# Altium PCB BMS_Carrier_Board.PcbDoc (part 1 of 3)
Units mm, origin at the board's own origin, x right, y up, seen from the top; angles counter-clockwise.
Board outline 80 x 70 mm, 2 copper layers (Top Layer, Bottom Layer); 98 components, 80 nets, 377 pads, 123 vias.
Unrouted connection lines stored in the file: 52.
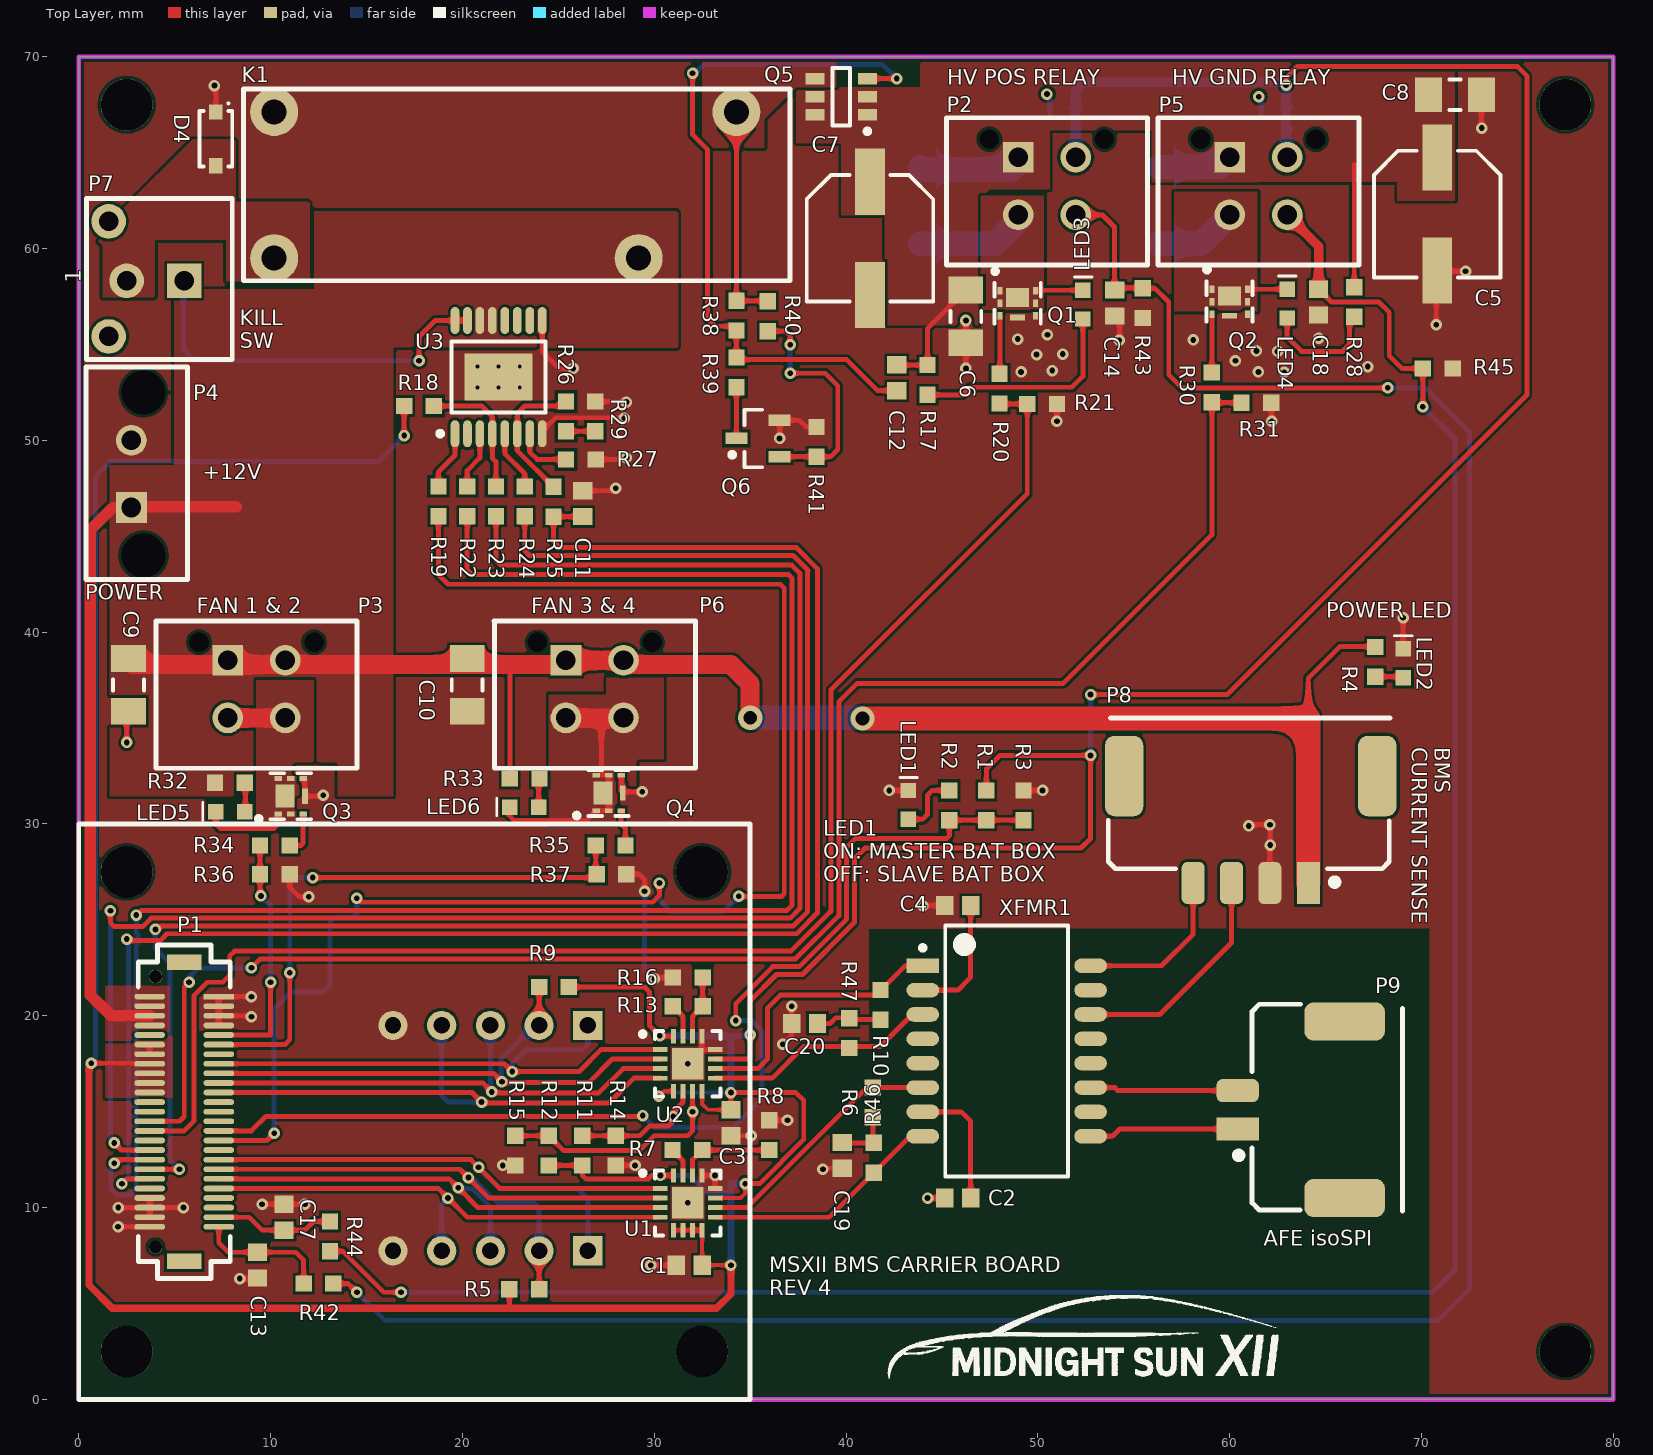
[diagram p0: Top Layer view]
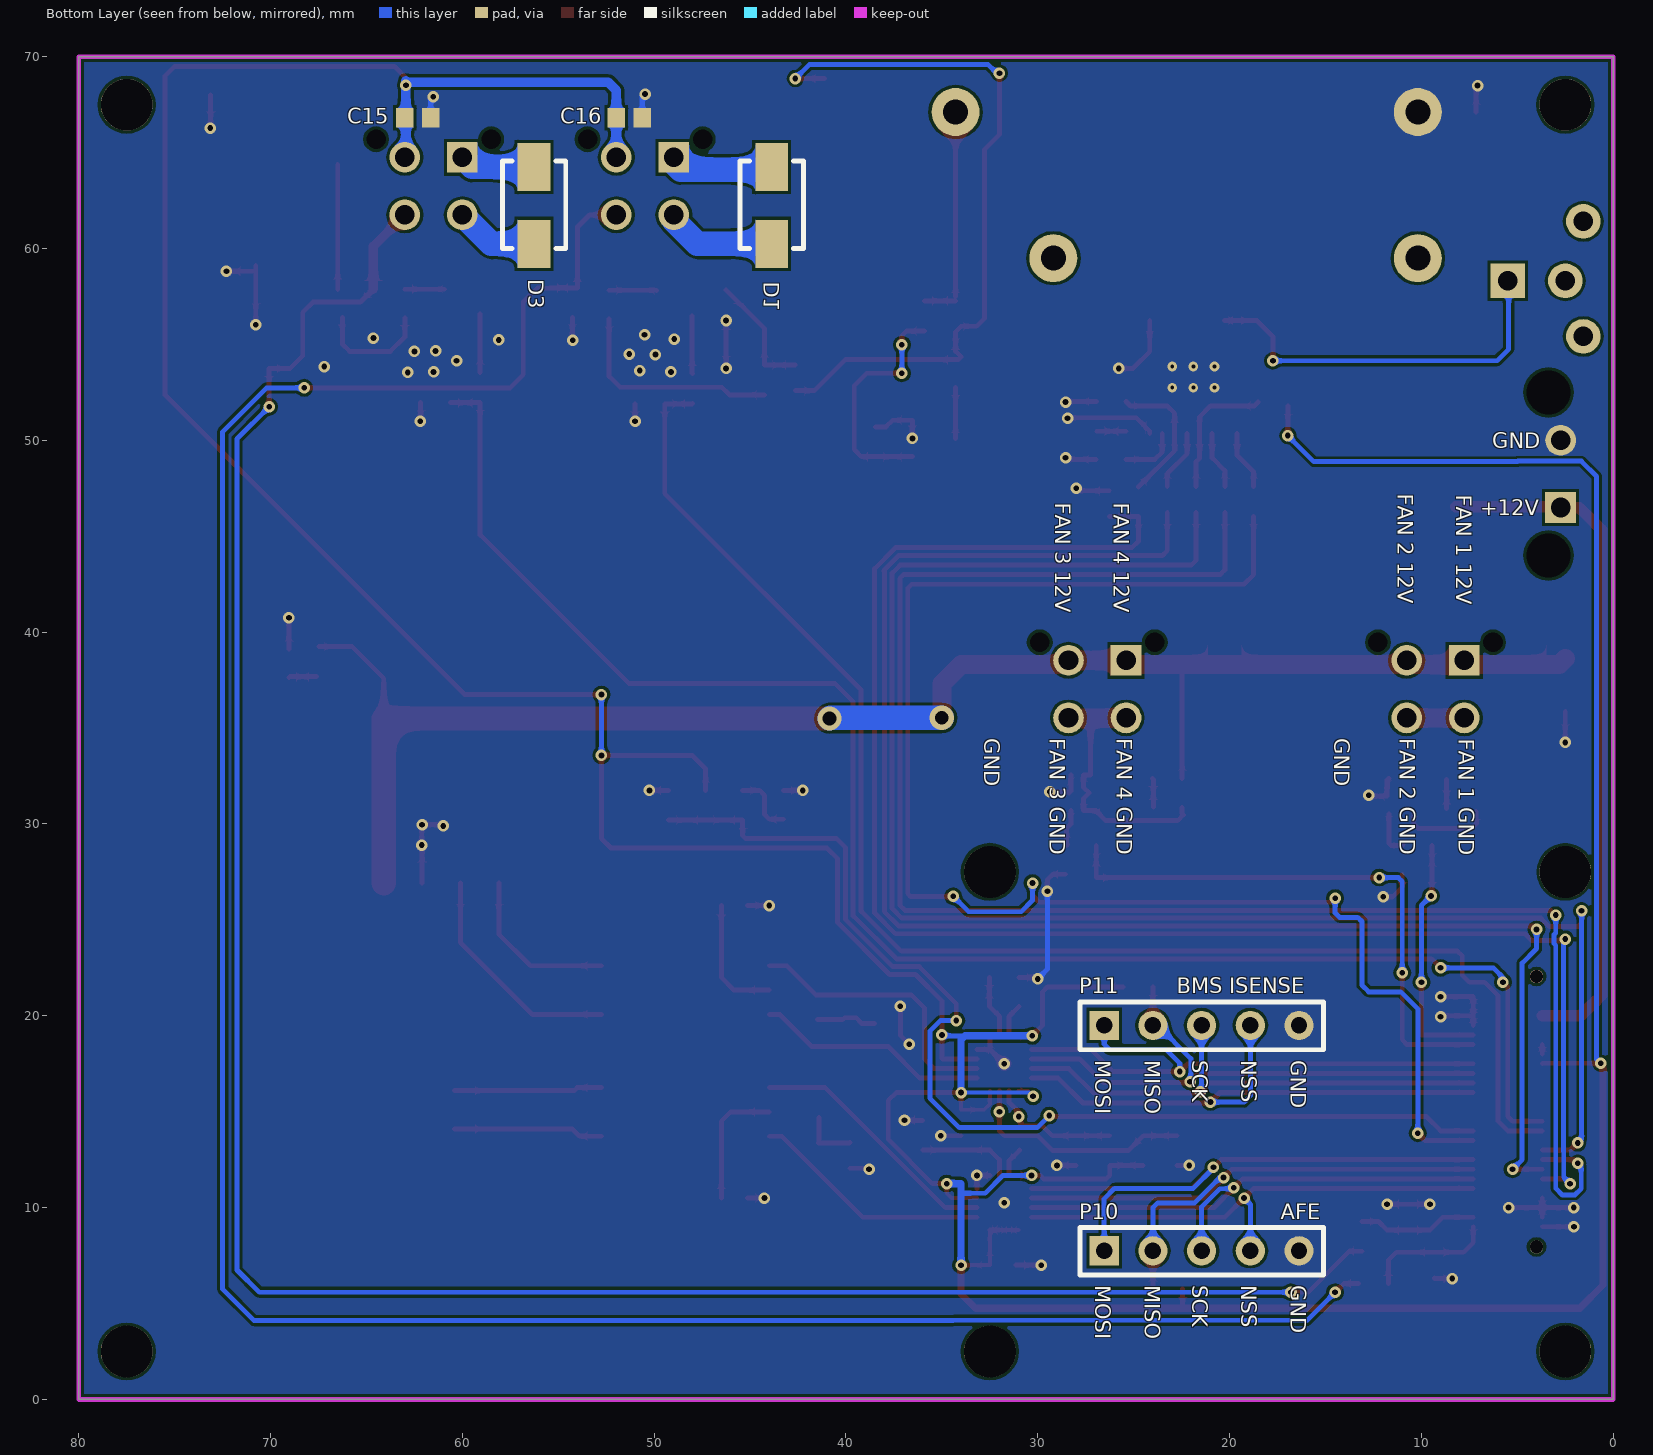
[diagram p1: Bottom Layer view, seen from below]
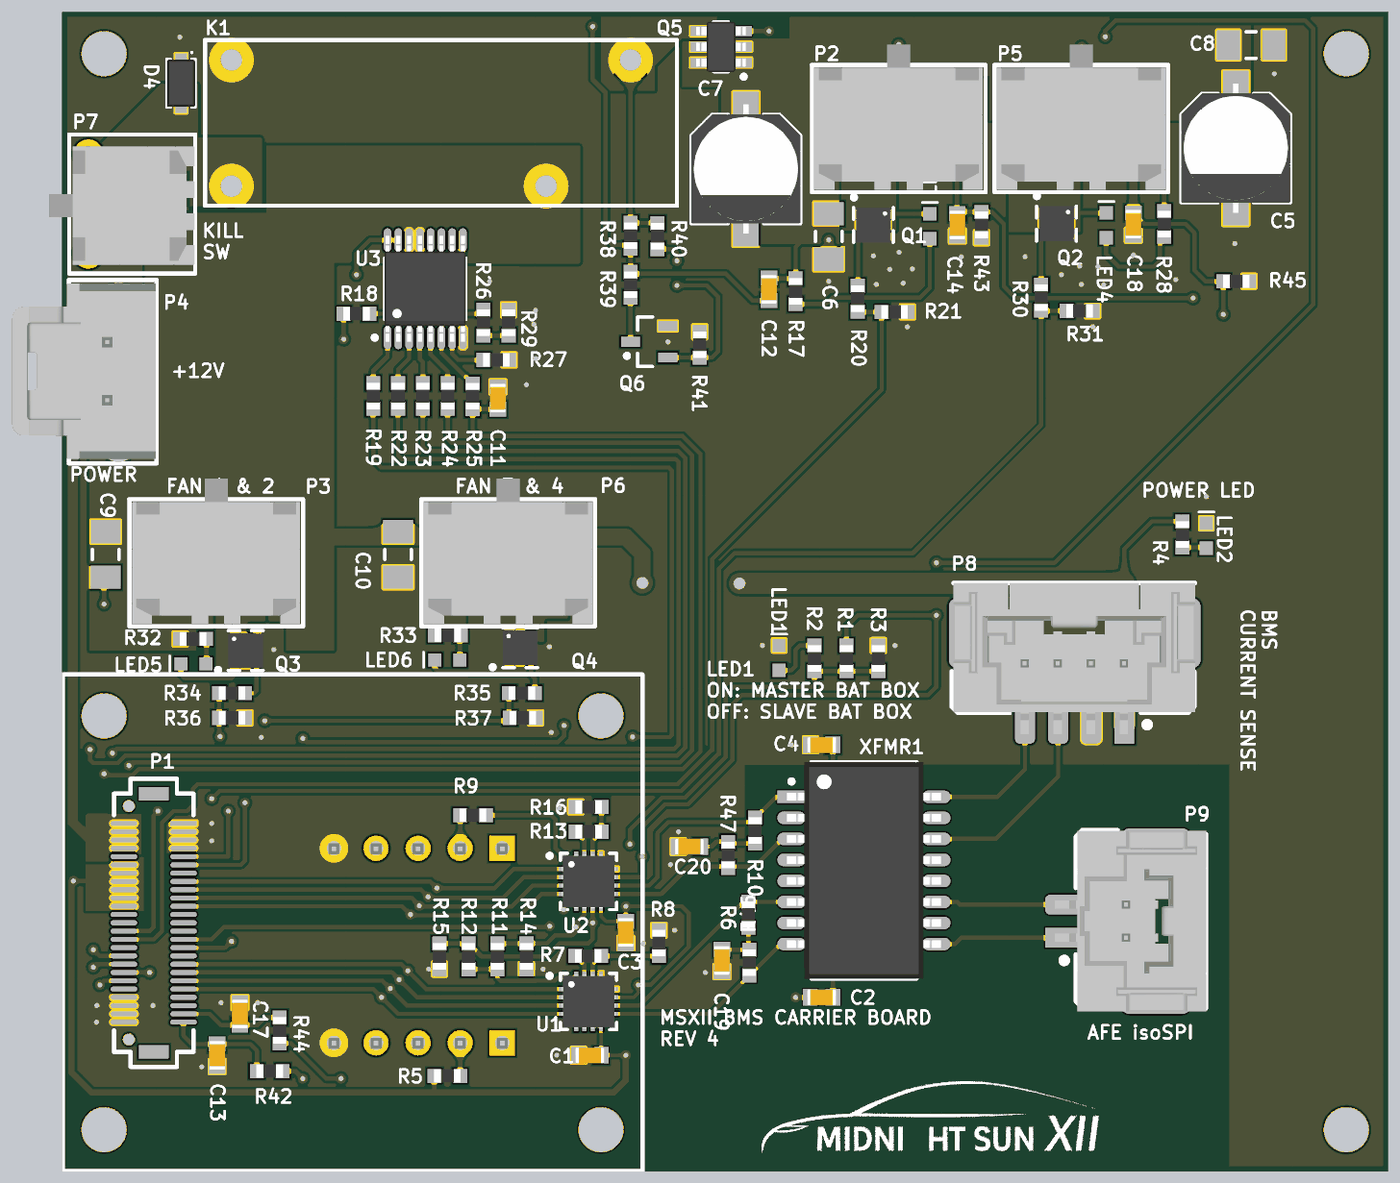
[diagram p3: 3D render of the assembled board from above, using the file's embedded part models]
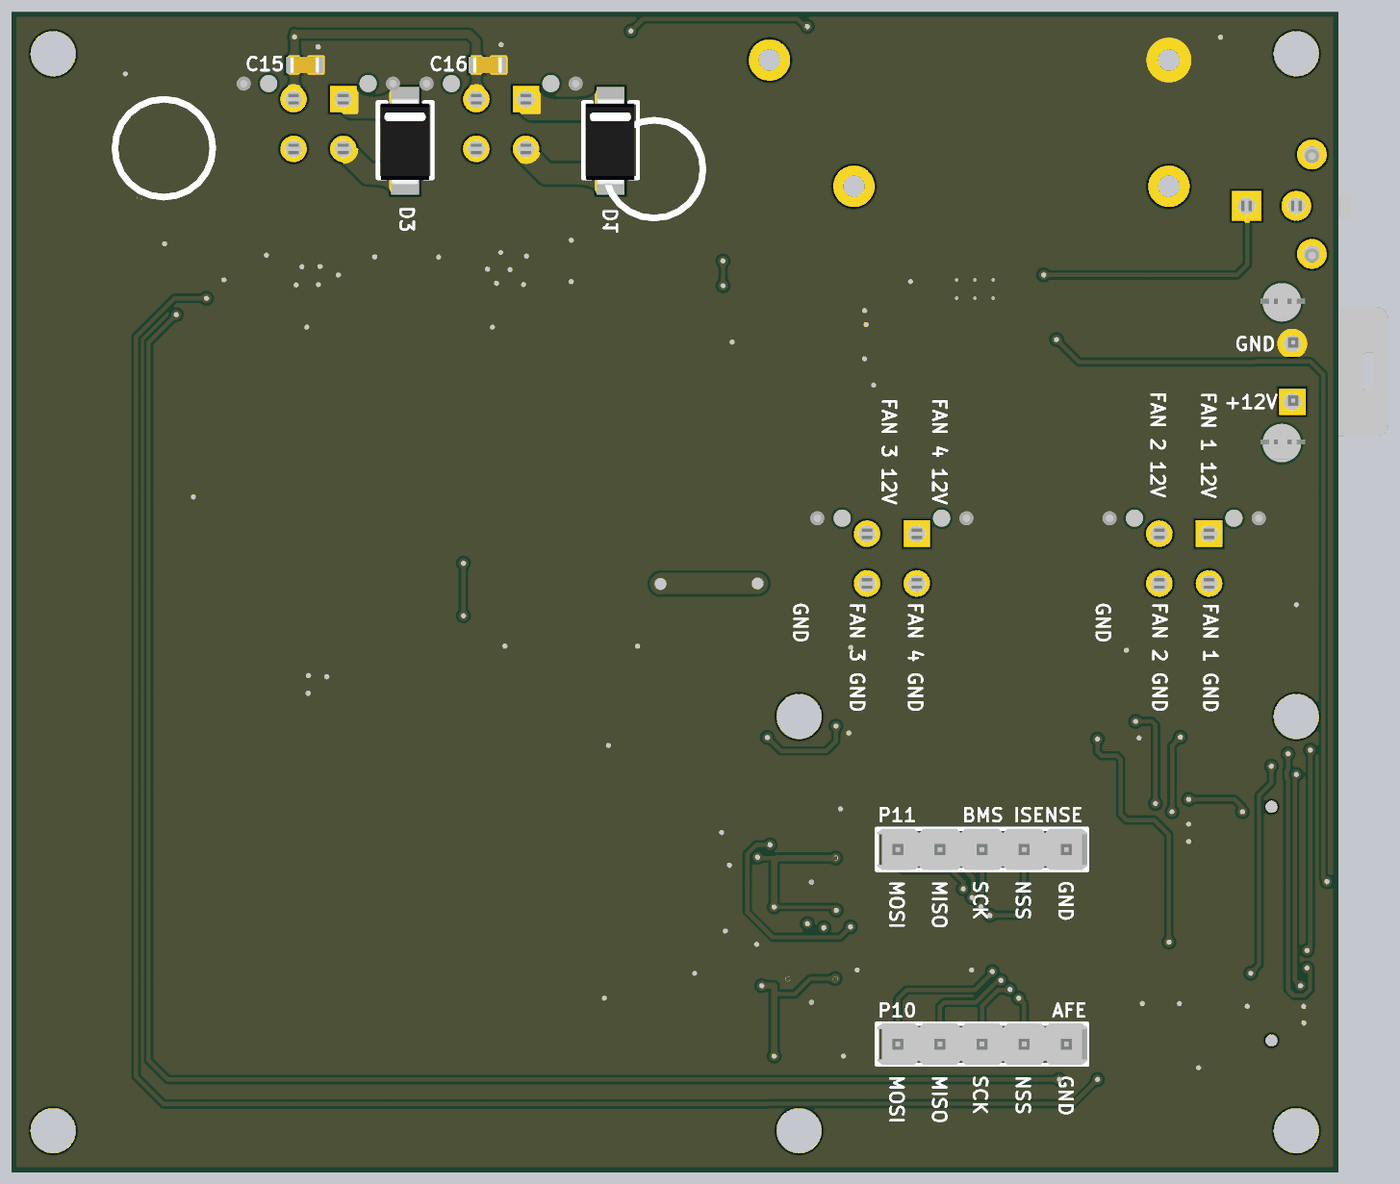
[diagram p4: 3D render of the assembled board from below, using the file's embedded part models]

## Layer stack, top to bottom
Top Solder: solder mask 0.0102, Solder Resist, Dk 3.5
Top Layer: signal copper 0.0356
Dielectric 1: dielectric 0.32, FR-4, Dk 4.8
Bottom Layer: signal copper 0.0356
Bottom Solder: solder mask 0.0102, Solder Resist, Dk 3.5

## Board outline
0,0 80,0 80,70 0,70 0,0

## Design rules (kind name [scope] priority, off if disabled: settings)
Clearance [All] p1: gap=0.152 ignorepadtopadclearanceinfootprint=TRUE except(0: Arc-Hole Track-Hole SMDPad-Hole THPad-Hole Via-Hole Fill-Hole Poly-Hole Region-Hole Text-Hole)
DiffPairsRouting [All] p1: maxlimit=0.254 minlimit=0.254 mostfreqgap=0.254 toplayer_minwidth=0.229 toplayer_maxwidth=0.381 toplayer_prefwidth=0.254 bottomlayer_minwidth=0.229 bottomlayer_maxwidth=0.381 bottomlayer_prefwidth=0.254 maxuncoupledlength=12.7
HoleSize [All] p1: absolutevalues=TRUE maxlimit=5.08 minlimit=0.025 maxpercent=80.000 minpercent=20.000
PasteMaskExpansion [All] p1 off: expansion=0
PlaneConnect [All] p1: planeconnectstyle=Direct reliefexpansion=0.508 reliefentries=4 reliefconductorwidth=0.254 reliefairgap=0.254
PolygonConnect [All] p1: connectstyle=Direct reliefconductorwidth=0.254 reliefentries=4 polygonreliefangle="90 Angle" airgapwidth=0.254
RoutingVias [All] p1: holewidth=0.3 width=0.6 viastyle="Through Hole" minholewidth=0.3 minwidth=0.3 maxholewidth=1.27 maxwidth=1.27 viatemplateguid#1={C0391581-418B-4562-8F26-D689074507C8} viatemplatename#1=v60h30m0mx0
SilkToBoardRegionClearance [All] p1 off:
SilkToSilkClearance [All] p1 off: silktosilkclearance=0.254
SilkToSolderMaskClearance [IsPad] p1 off: minsilkscreentomaskgap=0.254 clearancetoexposedcopper=TRUE
SolderMaskExpansion [All] p1: expansion=0.102
Width [All] p1: maxlimit=2.54 minlimit=0.203 preferedwidth=0.203
23 further rules are at their usual default settings.

## Classes and differential pairs
component class "BMS Carrier - Firmware Contactor Control": C13 C14 C15 C16 C17 C18 R42 R43 R44 R45
component class "BMS Carrier - Fan Controls": C9 C10 LED5 LED6 Q3 Q4 R32 R33 R34 R35 R36 R37
component class "BMS Carrier - Battery Relay Controls": C5 C6 C7 C8 C11 C12 D1 D3 D4 K1 LED3 LED4 Q1 Q2 Q5 Q6 R17 R18 R19 R20 R21 R22 R23 R24 R25 R26 R27 R28 R29 R30 R31 R38 R39 R40 R41 U3
component class "BMS Carrier - Current Sense Interface": C3 C4 C20 P11 R9 R10 R11 R12 R13 R14 R15 R16 R47 U2 XFMR1
component class "BMS Carrier - AFE Interface": C1 C2 C19 P10 R5 R6 R7 R8 R46 TP3/MOSI U1
component class "BMS Carrier - Connectors": LED2 P2 P3 P4 P5 P6 P7 P8 P9 R4
component class Controller_Board_Interface: LED1 P1 R1 R2 R3
differential pair I: +I_P -I_N
differential pair ISOSPI: +ISOSPI_P -ISOSPI_N
differential pair CURR: +CURR_P -CURR_N
differential pair CURR_ISOSPI: +CURR_ISOSPI_P -CURR_ISOSPI_N

## Components (designator, comment, footprint, x,y, rotation, side; value= is the part's Value field where it differs from the comment)
C1 "CAP CER 0.1UF 50V 10% X7R 0603" "CAP, 0603" 31.825,7 r180 top
C2 "CAP CER 20PF 50V ±5% C0G/NP0 0603" "CAP, 0603" 45.825,10.5 r180 top
C3 "CAP CER 0.1UF 50V 10% X7R 0603" "CAP, 0603" 34,14.425 r270 top
C4 "CAP CER 20PF 50V ±5% C0G/NP0 0603" "CAP, 0603" 45.825,25.75 r180 top
C5 "47UF" "CAP ALUM 6.3MM RADIAL SMD" 70.824,61.8 r270 top
C6 "CAP CER 2.2UF 100V ±20% X7R 1206" "CAP, 1206" 46.25,56.461 r270 top
C7 "47UF" "CAP ALUM 6.3MM RADIAL SMD" 41.25,60.535 r270 top
C8 "CAP CER 2.2UF 100V ±20% X7R 1206" "CAP, 1206" 71.75,68.02 r0 top
C9 "CAP CER 2.2UF 100V ±20% X7R 1206" "CAP, 1206" 2.594,37.25 r270 top
C10 "CAP CER 2.2UF 100V ±20% X7R 1206" "CAP, 1206" 20.25,37.25 r270 top
C11 "CAP CER 0.1UF 50V 10% X7R 0603" "CAP, 0603" 26.275,46.702 r90 top
C12 "CAP CER 4.7UF 25V 10% X5R 0603" "CAP, 0603" 42.644,53.269 r270 top
C13 "CAP CER 0.1UF 50V 10% X7R 0603" "CAP, 0603" 9.324,7 r270 top
C14 "CAP CER 10nF 50V 5% X7R 0603" "CAP, 0603" 54.014,57.159 r270 top
C15 "CAP CER 10nF 50V 5% X7R 0603" "CAP, 0603" 62.325,66.82 r180 bottom
C16 "CAP CER 10nF 50V 5% X7R 0603" "CAP, 0603" 51.3,66.82 r180 bottom
C17 "CAP CER 0.1UF 50V 10% X7R 0603" "CAP, 0603" 10.7,9.5 r90 top
C18 "CAP CER 10nF 50V 5% X7R 0603" "CAP, 0603" 64.64,57.209 r270 top
C19 "CAP CER 10nF 50V 5% X7R 0603" "CAP, 0603" 39.8,12.725 r270 top
C20 "CAP CER 10nF 50V 5% X7R 0603" "CAP, 0603" 37.842,19.6 r180 top
D1 "DIODE SCHOTTKY 60V 3A SMA" "Diode, SMA" 43.874,60.25 r90 bottom
D3 "DIODE SCHOTTKY 60V 3A SMA" "Diode, SMA" 56.265,60.25 r90 bottom
D4 "DIODE GEN PURP 100V 300MA SOD123" "DIODE GEN PURP 100V 300MA SOD123" 7.149,65.72 r270 top
K1 "G6RN-1A DC12" "RELAY SPST 8A 12VDC" 8.588,58.31 r0 top
LED1 "LED RED CLEAR 2V 0603" LED_0603 43.26,30.3 r90 top
LED2 "LED GREEN CLEAR 2V 0603" LED_0603 69.055,37.683 r90 top
LED3 "LED YELLOW CLEAR 2.1V 0603" LED_0603 52.359,56.375 r90 top
LED4 "LED YELLOW CLEAR 2.1V 0603" LED_0603 63.01,56.434 r90 top
LED5 "LED YELLOW CLEAR 2.1V 0603" LED_0603 8.599,30.655 r180 top
LED6 "LED YELLOW CLEAR 2.1V 0603" LED_0603 23.925,30.885 r180 top
P1 "CONN 50POS Bergstak Plug 0.02\"" "CONN, Bergstak 50 Pos Plug" 5.5,15 r0 top
P2 "CONN 4POS MICROFIT (2x2)" "CONN 4POS MICROFIT (2X2)" 51.975,61.76 r0 top
P3 "CONN 4POS MICROFIT (2x2)" "CONN 4POS MICROFIT (2x2)" 10.768,35.53 r0 top
P4 "CONN 2POS ULTRA-FIT 0.138\"" "CONN, 2POS ULTRA-FIT" 2.745,46.5 r90 top
P5 "CONN 4POS MICROFIT (2x2)" "CONN 4POS MICROFIT (2X2)" 63,61.76 r0 top
P6 "CONN 4POS MICROFIT (2x2)" "CONN 4POS MICROFIT (2x2)" 28.4,35.53 r0 top
P7 "CONN 2POS MICRO-FIT 3mm" "CONN, 2POS MICRO-FIT" 5.5,58.42 r90 top
P8 "Dura-Clik" "CONN, 4POS DURA-CLIK VERT" 64.1,26.92 r180 top
P9 "Dura-Clik" "CONN, 2POS Dura-Click Vertical" 60.42,14.1 r90 top
P10 "5POS 0.1\"" "CONN, 5POS HEADR 0.1\"" 26.54,7.75 r180 bottom
P11 "5POS 0.1\"" "CONN, 5POS HEADR 0.1\"" 26.54,19.5 r180 bottom
Q1 "MOSFET N-CH 30V 8.7A 2.1W 6-PQFN (2x2)" "MOSFET N-CH 30V 12A 2mmx2mm PQFN" 48.025,57.8 r270 top
Q2 "MOSFET N-CH 30V 8.7A 2.1W 6-PQFN (2x2)" "MOSFET N-CH 30V 12A 2mmx2mm PQFN" 59.075,57.884 r270 top
Q3 "MOSFET N-CH 30V 8.7A 2.1W 6-PQFN (2x2)" "MOSFET N-CH 30V 12A 2mmx2mm PQFN" 10.4,30.525 r0 top
Q4 "MOSFET N-CH 30V 8.7A 2.1W 6-PQFN (2x2)" "MOSFET N-CH 30V 12A 2mmx2mm PQFN" 26.975,30.695 r0 top
Q5 "MOSFET P-CH 30V 4A 1.6W SOT-23-6" P-MOSFET 39.75,67.916 r180 top
Q6 "MOSFET N-CH 60V 310MA SOT23" SOT23 35.413,50.1 r180 top
R1 "RES 0.0 OHM 1/4W 0603" "RES, 0603" 47.319,30.975 r270 top
R2 "RES 604 OHM 1% 1/10W 0603" "RES, 0603" 45.388,30.975 r90 top
R3 "RES 0.0 OHM 1/4W 0603" "RES, 0603" 49.25,30.975 r90 top
R4 "RES 4.7K OHM 1% 1/10W 0603" "RES, 0603" 67.6,38.458 r270 top
R5 "2K" "RES, 0603" 23.225,5.75 r0 top
R6 "62R" "RES, 0603" 41.4,15.485 r270 top
R7 "RES 1.4k OHM 1% 1/10W 0603" "RES, 0603" 31.725,13 r0 top
R8 "RES 604 OHM 1% 1/10W 0603" "RES, 0603" 36,13.775 r90 top
R9 "2K" "RES, 0603" 24.775,21.5 r180 top
R10 "62R" "RES, 0603" 41.8,20.575 r270 top
R11 "RES 0.0 OHM 1/4W 0603" "RES, 0603" 26.25,12.975 r90 top
R12 "RES 0.0 OHM 1/4W 0603" "RES, 0603" 24.5,12.975 r90 top
R13 "RES 1.4k OHM 1% 1/10W 0603" "RES, 0603" 31.75,20.5 r0 top
R14 "RES 0.0 OHM 1/4W 0603" "RES, 0603" 28,12.975 r270 top
R15 "RES 0.0 OHM 1/4W 0603" "RES, 0603" 22.75,12.975 r270 top
R16 "RES 604 OHM 1% 1/10W 0603" "RES, 0603" 31.75,22 r180 top
R17 "RES 4.7K OHM 1% 1/10W 0603" "RES, 0603" 44.25,53.15 r270 top
R18 "RES 10K OHM 1% 1/10W 0603" "RES, 0603" 17.74,51.791 r180 top
R19 "RES 4.7K OHM 1% 1/10W 0603" "RES, 0603" 18.75,46.825 r90 top
R20 "RES 22.1 OHM 1% 1/10W 0603" "RES, 0603" 48,52.7 r90 top
R21 "RES 10K OHM 1% 1/10W 0603" "RES, 0603" 50.225,51.9 r0 top
R22 "RES 4.7K OHM 1% 1/10W 0603" "RES, 0603" 20.25,46.825 r90 top
R23 "RES 4.7K OHM 1% 1/10W 0603" "RES, 0603" 21.75,46.825 r90 top
R24 "RES 4.7K OHM 1% 1/10W 0603" "RES, 0603" 23.25,46.825 r90 top
R25 "RES 4.7K OHM 1% 1/10W 0603" "RES, 0603" 24.75,46.8 r90 top
R26 "RES 3.3K OHM 1% 1/4W 0603" "RES, 0603" 25.4,51.25 r270 top
R27 "RES 4.7K OHM 1% 1/10W 0603" "RES, 0603" 26.175,49.007 r0 top
R28 "RES 4.7K OHM 1% 1/10W 0603" "RES, 0603" 66.5,57.214 r270 top
R29 "2K" "RES, 0603" 26.925,51.25 r90 top
R30 "RES 22.1 OHM 1% 1/10W 0603" "RES, 0603" 59.075,52.766 r90 top
R31 "RES 10K OHM 1% 1/10W 0603" "RES, 0603" 61.399,51.966 r0 top
R32 "RES 4.7K OHM 1% 1/10W 0603" "RES, 0603" 7.874,32.145 r0 top
R33 "RES 4.7K OHM 1% 1/10W 0603" "RES, 0603" 23.25,32.375 r0 top
R34 "RES 22.1 OHM 1% 1/10W 0603" "RES, 0603" 10.225,28.88 r180 top
R35 "RES 22.1 OHM 1% 1/10W 0603" "RES, 0603" 27.725,28.88 r180 top
R36 "RES 10K OHM 1% 1/10W 0603" "RES, 0603" 10.225,27.38 r0 top
R37 "RES 10K OHM 1% 1/10W 0603" "RES, 0603" 27.775,27.38 r0 top
R38 "RES 330 OHM 1% 1/10W 0603" "RES, 0603" 34.288,56.5 r270 top
R39 "1K" "RES, 0603" 34.288,53.544 r270 top
R40 "RES 0.0 OHM 1/4W 0603" "RES, 0603" 35.913,56.472 r270 top
R41 "RES 10K OHM 1% 1/10W 0603" "RES, 0603" 38.459,49.925 r90 top
R42 "1K" "RES, 0603" 12.5,6.04 r0 top
R43 "RES 10K OHM 1% 1/10W 0603" "RES, 0603" 55.47,57.159 r270 top
R44 "1K" "RES, 0603" 13.1,8.5 r270 top
R45 "RES 10K OHM 1% 1/10W 0603" "RES, 0603" 70.85,53.75 r0 top
R46 "62R" "RES, 0603" 41.45,12.6 r90 top
R47 "62R" "RES, 0603" 40.17,19.1 r90 top
U1 "IC ISOSPI COMM INTERFACE LTC6820IUD" "IC COMM INTERFACE ISOSPI 16-QFN" 30.325,11 r0 top
U2 "IC ISOSPI COMM INTERFACE LTC6820IUD" "IC COMM INTERFACE ISOSPI 16-QFN" 30.325,18.25 r0 top
U3 "296-45179-1-ND" "IC HSD Dual-Channel TSOP65P640X120_HS-17N" 21.89,53.3 r90 top
XFMR1 "IC PULSE XFMR 1CT:1CT 350UH SMD" "IC, PULSE XFMR 1CT:1CT 350UH SMD" 48.375,18.165 r0 top

## Footprints (in the part's own frame and the unit in brackets; to place one, negate y for a bottom-side part, rotate by r counter-clockwise, add the part's x,y. Pads: shape width x height; smd on the part's side, far side on the other; paste and mask are expansions set on the pad)
"CAP ALUM 6.3MM RADIAL SMD" [mm] "Aluminum Electrolytic Capacitor, Body 6.50x6.50x5.50mm, IPC Low Density"
  rect 3.45x1.55 smd: 1(-2.95,0) 2(2.95,0)
  silkscreen extent -3.3,-3.3 3.3,3.3, body extent -3.9,-3.3 3.9,3.3, height 5.5
"CAP, 0603" [mm] "Chip Capacitor, 2-Leads, Body 1.60x0.81mm, IPC Medium Density"
  rect 0.9x1 smd mask+0.076: 1(-0.675,0) 2(0.675,0)
  body extent -0.87,-0.48 0.87,0.48, height 0.9
"CAP, 1206" [mm] "Chip Capacitor, 2-Leads, Body 3.20x1.60mm, IPC Medium Density"
  rect 1.4x1.8 smd: 1(-1.375,0) 2(1.375,0)
  silkscreen extent -0.3,-0.8 0.3,0.8, body extent -1.68,-0.87 1.67,0.87, height 1.8
"CONN 4POS MICROFIT (2X2)" [mm]
  round 1.6 hole 1.02: 1(0,0) 2(-3,0) 3(0,3)
  rect 1.6x1.6 hole 1.02: 4(-3,3)
  round 0 hole 1.02: ""(-4.5,3.94) ""(1.5,3.94)
  silkscreen extent -6.75,-2.63 3.75,5.06, body extent -6.57,-2.47 3.57,6.29, height 9.91
"CONN 4POS MICROFIT (2x2)" [mm]
  round 1.6 hole 1.02: 1(0,0) 2(-3,0) 3(0,3)
  rect 1.6x1.6 hole 1.02: 4(-3,3)
  round 0 hole 1.02: ""(-4.5,3.94) ""(1.5,3.94)
  silkscreen extent -6.75,-2.63 3.75,5.06, body extent -6.57,-2.47 3.57,6.29, height 9.91
"CONN, 2POS Dura-Click Vertical" [mm] "WM7169CT-ND"
  rect 1.2x2.2 smd: 1(0,0)
  rrect50% 1.2x2.2 smd: 2(2,0)
  rrect50% 2x4.2 smd: 3(-3.6,-5.58) 3(5.6,-5.58)
  silkscreen extent -4.28,-8.6 6.5,0.05, body extent -4.45,-8.63 6.45,0.52, height 8
"CONN, 2POS MICRO-FIT" [mm]
  round 1.8 hole 1.02: 0(-3,3.94) 0(3,3.94) 2(-0.1,3)
  rect 1.8x1.8 hole 1.02: 1(-0.1,0)
  silkscreen extent -4.2,-2.5 4.2,5.1, body extent -3.67,-2.47 3.48,6.3, height 9.95
"CONN, 2POS ULTRA-FIT" [mm] "2 Positions Header, Shrouded Connector 0.138\" (3.50mm) Through Hole Gold"
  rect 1.6x1.6 hole 1.02: 1(0,0)
  round 1.6 hole 1.02: 2(3.5,0)
  round 1.6 hole 2.3: ""(-2.5,-0.63) ""(6,-0.63)
  silkscreen extent -3.74,-2.93 7.33,2.37, body extent -3.48,-2.87 7.12,5.79, height 13.85
"CONN, 4POS DURA-CLIK VERT" [mm]
  rect 1.2x2.2 smd: 1(0,0)
  rrect50% 1.2x2.2 smd: 2(2,0) 3(4,0) 4(6,0)
  rrect50% 2x4.2 smd: 7(-3.6,-5.58) 7(9.6,-5.58)
  silkscreen extent -4.28,-8.61 10.42,0.05, body extent -4.28,-8.61 10.32,0.54, height 8
"CONN, 5POS HEADR 0.1\"" [mil]
  rect 60x60 hole 33.46: 1(0,0)
  round 60 hole 33.46: 2(100,0) 3(200,0) 4(300,0) 5(400,0)
  silkscreen extent -50,-50 450,48, body extent -50,-50 450,48, height 335
"CONN, Bergstak 50 Pos Plug" [mm] "Bergstak 50 Position Plug"
  rect 1.6x0.3 smd: 1(1.8,6)
  oval 1.6x0.3 smd: 2(1.8,5.5) 3(1.8,5) 4(1.8,4.5) 5(1.8,4) 6(1.8,3.5) 7(1.8,3) 8(1.8,2.5) 9(1.8,2) 10(1.8,1.5) 11(1.8,1) 12(1.8,0.5) 13(1.8,0) 14(1.8,-0.5) 15(1.8,-1) 16(1.8,-1.5) 17(1.8,-2) 18(1.8,-2.5) 19(1.8,-3) 20(1.8,-3.5) 21(1.8,-4) 22(1.8,-4.5) 23(1.8,-5) 24(1.8,-5.5) 25(1.8,-6) 26(-1.8,-6) 27(-1.8,-5.5) 28(-1.8,-5) 29(-1.8,-4.5) 30(-1.8,-4) 31(-1.8,-3.5) 32(-1.8,-3) 33(-1.8,-2.5) 34(-1.8,-2) 35(-1.8,-1.5) 36(-1.8,-1) 37(-1.8,-0.5) 38(-1.8,0) 39(-1.8,0.5) 40(-1.8,1) 41(-1.8,1.5) 42(-1.8,2) 43(-1.8,2.5) 44(-1.8,3) 45(-1.8,3.5) 46(-1.8,4) 47(-1.8,4.5) 48(-1.8,5) 49(-1.8,5.5) 50(-1.8,6)
  round 0.7 hole 0.7: ""(-1.5,-7.05) ""(-1.5,7.05)
  rect 1.8x0.8 smd: ""(0,-7.8) ""(0,7.8)
  silkscreen extent -2.4,-8.7 2.4,8.7
"DIODE GEN PURP 100V 300MA SOD123" [mm] "Diode Standard 100V 300mA (DC) Surface Mount SOD-123"
  rect 0.8x0.7 smd: 1(-1.4,0) 2(1.4,0)
  silkscreen extent -1.9,-0.85 1.45,0.85, body extent -1.43,-0.85 1.43,0.85, height 1.35
"Diode, SMA" [mm]
  rect 2.5x1.7 smd: 1(0,0) 2(4,0)
  silkscreen extent -0.25,-1.65 4.32,1.65, body extent -0.69,-1.45 4.59,1.47, height 2.41
"IC COMM INTERFACE ISOSPI 16-QFN" [mm] "16-WFQFN Exposed Pad"
  rect 0.75x0.25 smd: 1(0,0) 2(0,-0.5) 3(0,-1) 4(0,-1.5) 9(2.85,-1.5) 10(2.85,-1) 11(2.85,-0.5) 12(2.85,0)
  rect 0.25x0.75 smd: 5(0.675,-2.175) 6(1.175,-2.175) 7(1.675,-2.175) 8(2.175,-2.175) 13(2.175,0.675) 14(1.675,0.675) 15(1.175,0.675) 16(0.675,0.675)
  rect 1.65x1.65 smd: 17(1.425,-0.75)
  silkscreen extent -1.05,-2.45 3.13,0.95, body extent -0.17,-2.35 3.03,0.85, height 0.8
"IC HSD Dual-Channel TSOP65P640X120_HS-17N" [mm] "TSOP, 16-Leads, Body 5.00x4.40mm, Pitch 0.65mm, Thermal Pad 3.55x2.46mm, IPC Medium Density"
  oval 1.4x0.45 smd: 1(-2.95,2.275) 2(-2.95,1.625) 3(-2.95,0.975) 4(-2.95,0.325) 5(-2.95,-0.325) 6(-2.95,-0.975) 7(-2.95,-1.625) 8(-2.95,-2.275) 9(2.95,-2.275) 10(2.95,-1.625) 11(2.95,-0.975) 12(2.95,-0.325) 13(2.95,0.325) 14(2.95,0.975) 15(2.95,1.625) 16(2.95,2.275)
  rect 2.46x3.55 smd: 17(0,0)
  silkscreen extent -3.07,-2.45 1.85,3.17, body extent -3.2,-2.45 3.2,2.45, height 1.2
"IC, PULSE XFMR 1CT:1CT 350UH SMD" [mm] "PULSE XFMR 1CT:1CT 350UH SMD"
  rect 1.7x0.76 smd: 1(-4.375,4.445)
  oval 1.7x0.76 smd: 2(-4.375,3.175) 3(-4.375,1.905) 4(-4.375,0.635) 5(-4.375,-0.635) 6(-4.375,-1.905) 7(-4.375,-3.175) 8(-4.375,-4.445) 9(4.375,-4.445) 10(4.375,-3.175) 11(4.375,-1.905) 12(4.375,-0.635) 13(4.375,0.635) 14(4.375,1.905) 15(4.375,3.175) 16(4.375,4.445)
  silkscreen extent -4.5,-6.55 3.2,6.55, body extent -4.65,-6.55 4.65,6.55, height 5.9
LED_0603 [mm]
  rect 0.8x0.8 smd: 1(-0.05,0.01) 2(1.45,0.01)
  silkscreen extent 2.13,-0.46 2.13,0.45, body extent -0.09,-0.39 1.51,0.41, height 0.8
"MOSFET N-CH 30V 12A 2mmx2mm PQFN" [mm] "PQFN, 6-Leads, Body 2.00x2.00mm, Pitch 0.65mm/0.50mm, Thermal Pad 1.00x1.20mm, IPC Medium Density"
  rect 0.4x0.25 smd: 1(0,0) 2(0.65,0) 3(1.3,0) 4(1.3,1.85) 5(0.65,1.85) 6(0,1.85)
  rect 1x1.2 smd: 7(0.35,0.925)
  rect 0.3x0.79 smd: 8(1.39,0.925)
  silkscreen extent -1.14,-0.38 1.7,2.12, body extent -0.4,-0.12 1.7,1.98, height 1
P-MOSFET [mm] "SOT23, 6-Leads, Body 2.93x2.80mm, Pitch 0.95mm, IPC Medium Density"
  rect 1x0.6 smd mask+0.076: 1(-1.365,0.95) 2(-1.365,0) 3(-1.365,-0.95) 4(1.365,-0.95) 5(1.365,0) 6(1.365,0.95)
  silkscreen extent -1.49,-1.5 0.45,1.92, body extent -1.5,-1.52 1.5,1.52, height 1.25
"RELAY SPST 8A 12VDC" [mm]
  round 2.5 hole 1.3: 1(1.6,1.19) 2(20.6,1.19) 3(25.7,8.81) 5(1.6,8.81)
  silkscreen extent 0,0.01 28.5,10.01, body extent 0,0.01 28.5,10.01, height 15
"RES, 0603" [mm] "Chip Resistor, 2-Leads, Body 1.60x0.80mm, IPC Medium Density"
  rect 0.85x0.85 smd: 1(-0.775,0) 2(0.775,0)
  body extent -0.8,-0.4 0.8,0.4, height 0.55
SOT23 [mm] "SOT23, 3-Leads, Body 2.9x1.3mm, Pitch 0.95mm, Lead Span 2.3mm - Reverse Pinning, IPC Medium Density"
  rect 1.15x0.6 smd: 1(1.125,0) 2(-1.125,-0.95) 3(-1.125,0.95)
  silkscreen extent -0.2,-1.5 1.47,1.5, body extent -0.7,-1.5 0.7,1.5, height 1.1

## Part data
C1 C3 C11 C13 C17: "0.10µF ±10% 50V Ceramic Capacitor X7R 0603 (1608 Metric)", Capacitance=0.1µF, Manufacturer 1="AVX Corporation", Manufacturer Part Number 1=06035C104KAT2A, Operating Temperature="-55°C ~ 125°C", Package / Case="0603 (1608 Metric)", Ratings=-, Supplier Part Number 1=478-5052-1-ND, Temperature Coefficient=X7R, Tolerance=±10%, Voltage=50V, ComponentLink1Description=http://datasheets.avx.com/X7RDielectric.pdf, ComponentLink1URL=http://datasheets.avx.com/X7RDielectric.pdf, Height - Seated (Max)=-, Lead Spacing=-, Lead Style=-, Mounting Type="Surface Mount, MLCC", Packaging="Cut Tape (CT)", Part Status=Active, Size / Dimension="0.063\" L x 0.032\" W (1.60mm x 0.81mm)", Supplier 1=Digi-Key, Thickness (Max)="0.035\" (0.90mm)"
C2 C4: "20pF ±5% 50V Ceramic Capacitor C0G, NP0 0603 (1608 Metric)", Capacitance=20pF, Manufacturer 1="Murata Electronics North America", Manufacturer Part Number 1=GRM1885C1H200JA01D, Operating Temperature="-55°C ~ 125°C", Package / Case="0603 (1608 Metric)", Ratings=-, Supplier Part Number 1=490-1410-1-ND, Temperature Coefficient="C0G, NP0", Tolerance=±5%, Voltage=50V, ComponentLink1Description=http://www.murata.com/~/media/webrenewal/support/library/catalog/products/capacitor/mlcc/c02e.ashx, ComponentLink1URL=http://www.murata.com/~/media/webrenewal/support/library/catalog/products/capacitor/mlcc/c02e.ashx, Height - Seated (Max)=-, Lead Spacing=-, Lead Style=-, Mounting Type="Surface Mount, MLCC", Packaging="Cut Tape (CT)", Part Status=Active, Size / Dimension="0.063\" L x 0.031\" W (1.60mm x 0.80mm)", Supplier 1=Digi-Key, Thickness (Max)="0.035\" (0.90mm)"
C5 C7: library part "CAP ALUM 47UF 20% 35V SMD", "47µF 35V Aluminum Electrolytic Capacitors Radial, Can - SMD 1000 Hrs @ 85°C", Capacitance=47uF, Case/Package=Radial, Manufacturer=Panasonic, Manufacturer Part Number=EEE-1VA470WP, Max Operating Temperature=85°C, Min Operating Temperature=-40°C, Package Quantity=1, Ripple Current=70mA, Supplier Part Number 1=PCE3961CT-ND, Tolerance=20%, Voltage Rating=35V, ComponentLink1Description=https://datasheet.ciiva.com/2983/aba0000ce2-2983926.pdf, ComponentLink1URL=https://datasheet.ciiva.com/2983/aba0000ce2-2983926.pdf, ComponentLink2Description=https://datasheet.ciiva.com/2983/aba0000ce2-2983927.pdf, ComponentLink2URL=https://datasheet.ciiva.com/2983/aba0000ce2-2983927.pdf, ComponentLink3Description=https://datasheet.ciiva.com/14598/70255710-14598937.pdf, ComponentLink3URL=https://datasheet.ciiva.com/14598/70255710-14598937.pdf, ComponentLink4Description=https://datasheet.ciiva.com/15165/getdatasheetpartid-86239-15165868.pdf, ComponentLink4URL=https://datasheet.ciiva.com/15165/getdatasheetpartid-86239-15165868.pdf, ComponentLink5Description=https://datasheet.ciiva.com/16507/aba0000ce2-16507965.pdf, ComponentLink5URL=https://datasheet.ciiva.com/16507/aba0000ce2-16507965.pdf, ComponentLink6Description=https://datasheet.ciiva.com/30206/11aba0000ce2-30206253.pdf, ComponentLink6URL=https://datasheet.ciiva.com/30206/11aba0000ce2-30206253.pdf, Contact Plating=Tin, Diameter=6.3mm, Height=5.4mm, Height - Seated (Max)=0.213inch, Lead Free="Lead Free", Length=5.5mm, Life (Hours)=1000Hour, Mount="Surface Mount,PCB", Packaging="Tape and Reel", Pricing 1="1=0.38, 10=0.263, 100=0.1579, 500=0.11846 (USD)", Radiation Hardening=No, REACH SVHC=Unknown, Ripple Current (AC)=70mA, Stock 1=2820, Supplier 1=Digi-Key, Termination=SMD/SMT, Voltage Rating (DC)=35V
C6 C8 C9 C10: "2.2µF ±20% 100V Ceramic Capacitor X7R 1206 (3216 Metric)", Capacitance=2.2µF, Manufacturer 1="Murata Electronics North America", Manufacturer Part Number 1=GRM31CR72A225MA73L, Operating Temperature="-55°C ~ 125°C", Package / Case="1206 (3216 Metric)", Ratings=-, Supplier Part Number 1=490-12773-1-ND, Temperature Coefficient=X7R, Tolerance=±20%, Voltage=100V, ComponentLink1Description=http://www.murata.com/~/media/webrenewal/support/library/catalog/products/capacitor/mlcc/c02e.ashx, ComponentLink1URL=http://www.murata.com/~/media/webrenewal/support/library/catalog/products/capacitor/mlcc/c02e.ashx, Height - Seated (Max)=-, Lead Spacing=-, Lead Style=-, Mounting Type="Surface Mount, MLCC", Packaging="Cut Tape (CT)", Part Status=Active, Size / Dimension="0.126\" L x 0.063\" W (3.20mm x 1.60mm)", Supplier 1=Digi-Key, Thickness (Max)="0.071\" (1.80mm)"
C12: "4.7µF ±10% 25V Ceramic Capacitor X5R 0603 (1608 Metric)", Capacitance=4.7µF, Manufacturer 1="Murata Electronics North America", Manufacturer Part Number 1=GRM188R61E475KE11D, Operating Temperature="-55°C ~ 85°C", Package / Case="0603 (1608 Metric)", Ratings=-, Supplier Part Number 1=490-7203-1-ND, Temperature Coefficient=X5R, Tolerance=±10%, Voltage=25V, ComponentLink1Description=http://www.murata.com/~/media/webrenewal/support/library/catalog/products/capacitor/mlcc/c02e.ashx, ComponentLink1URL=http://www.murata.com/~/media/webrenewal/support/library/catalog/products/capacitor/mlcc/c02e.ashx, Height - Seated (Max)=-, Lead Spacing=-, Lead Style=-, Mounting Type="Surface Mount, MLCC", Packaging="Cut Tape (CT)", Part Status=Active, Size / Dimension="0.063\" L x 0.031\" W (1.60mm x 0.80mm)", Supplier 1=Digi-Key, Thickness (Max)="0.031\" (0.80mm)"
C14 C15 C16 C18 C19 C20: "10000pF ±5% 50V Ceramic Capacitor U2J 0603 (1608 Metric)", Capacitance=10000pF, Manufacturer 1=KEMET, Manufacturer Part Number 1=C0603C103J5JAC7867, Operating Temperature="-55°C ~ 125°C", Package / Case="0603 (1608 Metric)", Ratings=-, Supplier Part Number 1=399-13384-1-ND, Temperature Coefficient=U2J, Tolerance=±5%, Voltage=50V, ComponentLink1Description=http://www.kemet.com/docfinder?Partnumber=C0603C103J5JAC7867, ComponentLink1URL=http://www.kemet.com/docfinder?Partnumber=C0603C103J5JAC7867, Failure Rate=-, Height - Seated (Max)=-, Lead Spacing=-, Lead Style=-, Mounting Type="Surface Mount, MLCC", Packaging="Cut Tape (CT)", Part Status=Active, Size / Dimension="0.063\" L x 0.032\" W (1.60mm x 0.80mm)", Supplier 1=Digi-Key, Thickness (Max)="0.034\" (0.87mm)"
D1 D3: "Diode Schottky 60V 3A Surface Mount SMA", Capacitance @ Vr, F="200pF @ 4V, 1MHz", Current - Average Rectified (Io)=3A, Current - Reverse Leakage @ Vr="500µA @ 60V", Manufacturer 1="Diodes Incorporated", Manufacturer Part Number 1=B360A-13-F, Operating Temperature - Junction="-55°C ~ 150°C", Package / Case="DO-214AC, SMA", Supplier Device Package=SMA, Supplier Part Number 1=B360A-FDICT-ND, Voltage - DC Reverse (Vr) (Max)=60V, Voltage - Forward (Vf) (Max) @ If="700mV @ 3A", ComponentLink1Description=https://www.diodes.com/assets/Datasheets/ds30891.pdf, ComponentLink1URL=https://www.diodes.com/assets/Datasheets/ds30891.pdf, Diode Type=Schottky, Mounting Type="Surface Mount", Packaging="Cut Tape (CT)", Part Status=Active, Speed="Fast Recovery =< 500ns, > 200mA (Io)", Supplier 1=Digi-Key
D4: "Diode Standard 100V 300mA (DC) Surface Mount SOD-123", Case/Package=SOD-123-2, Forward Current=300mA, Forward Voltage=1.25V, Manufacturer="Diodes Zetex", Manufacturer Part Number=1N4148WQ-7-F, Max Operating Temperature=150°C, Max Power Dissipation=400mW, Max Repetitive Reverse Voltage (Vrrm)=100V, Max Surge Current=2A, Min Operating Temperature=-65°C, Package Quantity=3000, Peak Reverse Current=50uA, Supplier Part Number 1=1N4148WQ-7-FDICT-ND, ComponentLink1Description=http://components.arrow.com/part/dataview/0323_07206809, ComponentLink1URL=http://components.arrow.com/part/dataview/0323_07206809, ComponentLink2Description=http://www.diodes.com/datasheets/ds30086.pdf, ComponentLink2URL=http://www.diodes.com/datasheets/ds30086.pdf, ComponentLink3Description=http://www.mouser.com/ds/2/115/ds30086-318161.pdf, ComponentLink3URL=http://www.mouser.com/ds/2/115/ds30086-318161.pdf, Contact Plating=Tin,Matte, Element Configuration=Single, Lead Free="Lead Free", Mount="Surface Mount", Number of Pins=2, Packaging="Tape and Reel", Peak Non-Repetitive Surge Current=2A, Pricing 1="1=0.22, 10=0.196, 100=0.107, 500=0.0658, 1000=0.0449 (USD)", Recovery Time=4ns, Reverse Recovery Time=4ns, Stock 1=229, Supplier 1=Digi-Key, Weight=0.000353oz
K1: library part "RELAY SPST 12V 8A OMRON", "Omron Relay SPST (1 Form A) Through Hole", Coil Power="220 mW", Coil Voltage=12V, Switching Voltage="250VAC, 30VDC - Max", Coil Type="Non Latching", ComponentLink1Description=Datasheet, ComponentLink1URL=https://omronfs.omron.com/en_US/ecb/products/pdf/en-g6rn.pdf, Contact Form=SPST, Manufacturer Part Number="G6RN-1A DC12", Operate Time=15ms, Supplier 1=Digi-Key, Supplier 2=Digi-Key, Supplier Part Number 2=Z2346-ND
LED1: "Red 631nm LED Indication - Discrete 2V 0603 (1608 Metric)", Color=Red, Current - Test=20mA, Lens Color=Colorless, Manufacturer="Wurth Electronics Inc.", Manufacturer Part Number=150060RS75000, Millicandela Rating=250mcd, Package / Case="0603 (1608 Metric)", Supplier Device Package=0603, Supplier Part Number 1=732-4978-1-ND, Voltage - Forward (Vf) (Typ)=2V, Category=Optoelectronics, ComponentLink1Description=http://katalog.we-online.de/led/datasheet/150060RS75000.pdf, ComponentLink1URL=http://katalog.we-online.de/led/datasheet/150060RS75000.pdf, Features=-, Height (Max)=0.80mm, Lens Style/Size="Rectangle with Flat Top, 1.10mm x 0.70mm", Lens Transparency=Clear, Mounting Type="Surface Mount", Packaging="Cut Tape (CT)", Part Status=Active, Pricing 1="1=0.21, 100=0.1617, 500=0.13964 (CAD)", RoHS="RoHS Compliant", Size / Dimension="1.60mm L x 0.80mm W", Stock 1=35521, Supplier 1=Digi-Key, Viewing Angle=140°, Wavelength - Dominant=625nm, Wavelength - Peak=630nm
LED2: "Green 572nm LED Indication - Discrete 2V 0603 (1608 Metric)", Color=Green, Current - Test=20mA, Lens Color=Colorless, Manufacturer="Wurth Electronics Inc.", Manufacturer Part Number=150060VS75000, Millicandela Rating=40mcd, Package / Case="0603 (1608 Metric)", Supplier Device Package=0603, Supplier Part Number 1=732-4980-1-ND, Voltage - Forward (Vf) (Typ)=2V, Category=Optoelectronics, ComponentLink1Description=http://katalog.we-online.de/led/datasheet/150060VS75000.pdf, ComponentLink1URL=http://katalog.we-online.de/led/datasheet/150060VS75000.pdf, Features=-, Height (Max)=0.80mm, Lens Style/Size="Rectangle with Flat Top, 1.10mm x 0.70mm", Lens Transparency=Clear, Mounting Type="Surface Mount", Packaging="Cut Tape (CT)", Part Status=Active, Pricing 1="1=0.21, 100=0.1617, 500=0.13964 (CAD)", RoHS="RoHS Compliant", Size / Dimension="1.60mm L x 0.80mm W", Stock 1=9408, Supplier 1=Digi-Key, Viewing Angle=140°, Wavelength - Dominant=570nm, Wavelength - Peak=572nm
LED3 LED4 LED5 LED6: "Yellow 590nm LED Indication - Discrete 2V 0603 (1608 Metric)", Color=Yellow, Current - Test=20mA, Lens Color=Colorless, Manufacturer="Wurth Electronics Inc.", Manufacturer Part Number=150060YS75000, Millicandela Rating=120mcd, Package / Case="0603 (1608 Metric)", Supplier Device Package=0603, Supplier Part Number 1=732-4981-1-ND, Voltage - Forward (Vf) (Typ)=2V, Category=Optoelectronics, ComponentLink1Description=http://katalog.we-online.de/led/datasheet/150060YS75000.pdf, ComponentLink1URL=http://katalog.we-online.de/led/datasheet/150060YS75000.pdf, Features=-, Height (Max)=0.80mm, Lens Style/Size="Rectangle with Flat Top, 1.10mm x 0.70mm", Lens Transparency=Clear, Mounting Type="Surface Mount", Packaging="Cut Tape (CT)", Part Status=Active, Pricing 1="1=0.21, 100=0.1617, 500=0.13964 (CAD)", RoHS="RoHS Compliant", Size / Dimension="1.60mm L x 0.80mm W", Stock 1=10523, Supplier 1=Digi-Key, Viewing Angle=140°, Wavelength - Dominant=590nm, Wavelength - Peak=595nm
P1: "50 Position Connector Plug, Outer Shroud Contacts Surface Mount Gold", Manufacturer 1="Amphenol FCI", Manufacturer Part Number 1=10132797-055100LF, Supplier Part Number 1=609-5226-1-ND, ComponentLink1Description=http://portal.fciconnect.com/Comergent//fci/drawing/10132797.pdf, ComponentLink1URL=http://portal.fciconnect.com/Comergent//fci/drawing/10132797.pdf, Connector Type="Plug, Outer Shroud Contacts", Contact Finish=Gold, Contact Finish Thickness="1µin (0.025µm)", Height Above Board="0.169\" (4.30mm)", Mated Stacking Heights=5mm, Mounting Type="Surface Mount", Number of Positions=50, Number of Rows=2, Packaging="Cut Tape (CT)", Part Status=Active, Pitch="0.020\" (0.50mm)", Series="BergStak Plug", Supplier 1=Digi-Key
P2 P3 P5 P6: "Micro-Fit 3.0 Vertical Header, 3.00mm Pitch, Dual Row, 4 Circuits, with PCB Polarizing Peg, Tin, Glow-Wire Capable, Black", Supplier Part Number 1=WM10667-ND, ComponentLink1Description=Datasheet, ComponentLink1URL=https://www.molex.com/molex/products/datasheet.jsp?part=active/0430450427_PCB_HEADERS.xml, Supplier 1=Digi-Key
P4: "2 Positions Header, Shrouded Connector 0.138\" (3.50mm) Through Hole Gold", Current Rating=-, Insulation Color=Black, Manufacturer 1="Molex, LLC", Manufacturer Part Number 1=1722861302, Material Flammability Rating="UL94 V-0", Operating Temperature="-40°C ~ 120°C", Supplier Part Number 1=WM11673-ND, Voltage=400V, ComponentLink1Description=http://www.molex.com/pdm_docs/sd/1722861302_sd.pdf, ComponentLink1URL=http://www.molex.com/pdm_docs/sd/1722861302_sd.pdf, Connector Type=Header, Contact Finish - Mating=Gold, Contact Finish - Post=Tin, Contact Finish Thickness - Mating="30µin (0.76µm)", Contact Finish Thickness - Post="60µin (1.52µm)", Contact Length - Mating=-, Contact Length - Post="0.126\" (3.20mm)", Contact Material="Copper Alloy", Contact Shape=Square, Contact Type="Male Pin", Fastening Type="Latch Holder", Ingress Protection=-, Insulation Height="0.465\" (11.80mm)", Insulation Material="Liquid Crystal Polymer (LCP)", Mated Stacking Heights=26.99mm, Mounting Type="Through Hole", Number of Positions=2, Number of Positions Loaded=All, Number of Rows=1, Overall Contact Length=-, Packaging=Tray, Part Status=Active, Pitch - Mating="0.138\" (3.50mm)", Row Spacing - Mating=-, Series=UltraFit, Shrouding="Shrouded - 4 Wall", Style="Board to Board or Cable", Supplier 1=Digi-Key, Termination="Kinked Pin, Solder"
P7: "Connector Header Through Hole 2 position", Contact Resistance=10mR, Current Rating=5A, Housing Colour=Black, Manufacturer=Molex, Manufacturer Part Number=43045-0227, Max Operating Temperature=105°C, Max Voltage Rating (DC)=250.25kV, Min Operating Temperature=-40°C, Package Quantity=3168, Supplier Part Number 1=WM10657-ND, Voltage Rating=600V, ComponentLink1Description=http://www.onlinecomponents.com/productFiles/mf-MOL/307170430450227_pcb_headers.pdf, ComponentLink1URL=http://www.onlinecomponents.com/productFiles/mf-MOL/307170430450227_pcb_headers.pdf, ComponentLink2Description=http://www.mouser.com/ds/2/276/0430450227_PCB_HEADERS-142611.pdf, ComponentLink2URL=http://www.mouser.com/ds/2/276/0430450227_PCB_HEADERS-142611.pdf, ComponentLink3Description=http://uk.rs-online.com/webdocs/13c3/0900766b813c3a46.pdf, ComponentLink3URL=http://uk.rs-online.com/webdocs/13c3/0900766b813c3a46.pdf, ComponentLink4Description=http://www.molex.com/webdocs/datasheets/pdf/en-us/0430450227_PCB_HEADERS.pdf, ComponentLink4URL=http://www.molex.com/webdocs/datasheets/pdf/en-us/0430450227_PCB_HEADERS.pdf, Contact Material=Brass, Contact Plating=Tin, Depth=8.77mm, Gender=Male, Glow Wire Compliant=Compliant, Halogen Free="Low Halogen", Housing Material=Thermoplastic, Length=7.15mm, Mount="Through Hole", Number of Circuits=2, Number of Contacts=2, Number of Ports=1, Number of Positions=2, Number of Rows=2, Number of Terminals=2, Orientation=Vertical, Packaging=Tray, Pitch=3mm, Pricing 1="1=0.84, 10=0.74, 25=0.6968, 50=0.6676, 100=0.6387, 250=0.5806, 500=0.52254, 1000=0.46448, 2500=0.42094 (USD)", Radiation Hardening=No, Row Spacing=3mm, Stock 1=3657, Supplier 1=Digi-Key, Termination=Solder
P8: library part "CONN 4POS DURA-CLIK 0.079\"", "4 Positions Header Connector 0.079\" (2.00mm) Surface Mount Tin", Current Rating=-, Insulation Color=Natural, Manufacturer="Molex, LLC", Manufacturer Part Number=5600200420, Supplier Part Number 1=WM10864CT-ND, Applications="Automotive, Industrial", Category="Connectors, Interconnects", ComponentLink1Description=http://www.molex.com/pdm_docs/sd/5600200420_sd.pdf, ComponentLink1URL=http://www.molex.com/pdm_docs/sd/5600200420_sd.pdf, Connector Type=Header, Contact Finish - Mating=Tin, Contact Finish - Post=Tin, Contact Finish Thickness - Mating=-, Contact Finish Thickness - Post=-, Contact Length - Mating=-, Contact Length - Post=-, Contact Material="Copper Alloy", Contact Shape=Square, Contact Type="Male Pin", Fastening Type="Latch Lock", Features="Solder Retention", Ingress Protection=-, Insulation Height="0.315\" (8.00mm)", Insulation Material="Polyamide (PA), Nylon", Mated Stacking Heights=9.3mm, Material Flammability Rating=-, Mounting Type="Surface Mount", Number of Positions=4, Number of Positions Loaded=All, Number of Rows=1, Operating Temperature=-, Overall Contact Length=-, Packaging="Cut Tape (CT)", Part Status=Active, Pitch - Mating="0.079\" (2.00mm)", Pricing 1="1=2.23, 10=2.022, 25=1.898, 50=1.8156, 100=1.733 (CAD)", RoHS="RoHS Compliant", Row Spacing - Mating=-, Shrouding="Shrouded - 4 Wall", Stock 1=9367, Style="Board to Cable/Wire", Supplier 1=Digi-Key, Termination=Solder, Voltage Rating=-
P9: library part "CONN 2POS DURA-CLIK 0.079\" VERT", "2 Positions Header, Shrouded Connector 0.079\" (2.00mm) Surface Mount, Vertical Tin", Current Rating=-, Insulation Color=Natural, Manufacturer="Molex, LLC", Manufacturer Part Number=5600200220, Supplier Part Number 1=WM10862CT-ND, Applications="Automotive, Industrial", Category="Connectors, Interconnects", ComponentLink1Description=http://www.molex.com/pdm_docs/sd/5600200220_sd.pdf, ComponentLink1URL=http://www.molex.com/pdm_docs/sd/5600200220_sd.pdf, Connector Type=Header, Contact Finish - Mating=Tin, Contact Finish - Post=Tin, Contact Finish Thickness - Mating=-, Contact Finish Thickness - Post=-, Contact Length - Mating=-, Contact Length - Post=-, Contact Material="Copper Alloy", Contact Shape=Square, Contact Type="Male Pin", Fastening Type="Latch Lock", Features="Solder Retention", Ingress Protection=-, Insulation Height="0.315\" (8.00mm)", Insulation Material="Polyamide (PA), Nylon", Mated Stacking Heights=9.3mm, Material Flammability Rating=-, Mounting Type="Surface Mount", Number of Positions=2, Number of Positions Loaded=All, Number of Rows=1, Operating Temperature=-, Overall Contact Length=-, Packaging="Cut Tape (CT)", Part Status=Active, Pitch - Mating="0.079\" (2.00mm)", Pricing 1="1=1.16, 10=1.012, 25=0.952, 50=0.9122, 100=0.8727, 250=0.79336 (CAD)", RoHS="RoHS Compliant", Row Spacing - Mating=-, Shrouding="Shrouded - 4 Wall", Stock 1=11912, Style="Board to Cable/Wire", Supplier 1=Digi-Key, Termination=Solder, Voltage Rating=-
P10 P11: library part "CONN 5POS HEADR MALE 0.1\"", Colour=Black, Contact Resistance=20mR, Manufacturer 1=Molex, Manufacturer Part Number 1=0022284050, Max Operating Temperature=75°C, Max Voltage Rating (AC)=250V, Min Operating Temperature=0°C, Supplier Part Number 1=WM50014-05-ND, ComponentLink1Description=https://datasheet.ciiva.com/6814/022284363-sd-6814049.pdf, ComponentLink1URL=https://datasheet.ciiva.com/6814/022284363-sd-6814049.pdf, ComponentLink2Description=https://datasheet.ciiva.com/14804/179390022284050-pcb-headers-14804361.pdf, ComponentLink2URL=https://datasheet.ciiva.com/14804/179390022284050-pcb-headers-14804361.pdf, ComponentLink3Description=https://datasheet.ciiva.com/15217/getdatasheetpartid-256138-15217709.pdf, ComponentLink3URL=https://datasheet.ciiva.com/15217/getdatasheetpartid-256138-15217709.pdf, Connector Type="Male Pin", Contact Material=Bronze,Brass, Contact Mating Length=0.24inch, Contact Plating=Nickel,Tin, Depth=2.49mm, Description 1="Conn Unshrouded Header HDR 5 POS 2.54mm Solder ST Thru-Hole KK® Bag", Gender=Male, Housing Colour=Black, Housing Material=Nylon, Length=12.7mm, Max Voltage Rating (DC)=250V, Mount="Through Hole", Number of Contacts=5, Number of Positions=5, Number of Rows=1, Orientation=Straight, Packaging=Bulk, Pitch=2.54mm, Pricing 1="1=0.22, 10=0.21, 25=0.1796, 50=0.157, 100=0.1459, 250=0.129, 500=0.1234 (USD)", Stock 1=3161, Supplier 1=Digi-Key, Termination=Solder
Q1 Q2 Q3 Q4: Current - Continuous Drain (Id) @ 25°C=8.7A, Drain to Source Voltage (Vdss)=30V, Drive Voltage (Max Rds On,  Min Rds On)="2.5V, 4.5V", Input Capacitance (Ciss) (Max) @ Vds="1019pF @ 25V", Manufacturer 1="Infineon Technologies", Manufacturer Part Number 1=IRLHS6342TRPBF, Operating Temperature="-55°C ~ 150°C (TJ)", Package / Case=6-PowerVDFN, Power Dissipation (Max)=2.1W, Supplier Device Package="6-PQFN (2x2)", Supplier Part Number 1=IRLHS6342TRPBFCT-ND, Category="Discrete Semiconductor Products", ComponentLink1Description=http://www.infineon.com/dgdl/irlhs6342pbf.pdf?fileId=5546d462533600a401535663b52625ad, ComponentLink1URL=http://www.infineon.com/dgdl/irlhs6342pbf.pdf?fileId=5546d462533600a401535663b52625ad, Description 1="MOSFET N-CH 30V 8.7A 2X2 PQFN", FET Feature=-, FET Type=N-Channel, Gate Charge (Qg) (Max) @ Vgs="11nC @ 4.5V", Mounting Type="Surface Mount", Packaging="Cut Tape (CT)", Part Status=Active, Pricing 1="1=0.79, 10=0.685, 100=0.5118, 500=0.4022, 1000=0.31079 (CAD)", Rds On (Max) @ Id, Vgs="15.5 mOhm @ 8.5A, 4.5V", RoHS="RoHS Compliant", Stock 1=9984, Supplier 1=Digi-Key, Technology="MOSFET (Metal Oxide)", Vgs (Max)=±12V, Vgs(th) (Max) @ Id="1.1V @ 10µA"
Q5: "P-Channel 30V 4A (Ta) 1.6W (Ta) Surface Mount SOT-23-6", Current - Continuous Drain (Id) @ 25°C="4A (Ta)", Drain to Source Voltage (Vdss)=30V, Drive Voltage (Max Rds On,  Min Rds On)="4.5V, 10V", Input Capacitance (Ciss) (Max) @ Vds="639pF @ 25V", Manufacturer 1=STMicroelectronics, Manufacturer Part Number 1=STT4P3LLH6, Operating Temperature="150°C (TJ)", Package / Case=SOT-23-6, Power Dissipation (Max)="1.6W (Ta)", Supplier Part Number 1=497-15521-1-ND, ComponentLink1Description=http://www.st.com/content/ccc/resource/technical/document/datasheet/13/e4/a1/65/8b/79/44/73/DM00084060.pdf/files/DM00084060.pdf/jcr:content/translations/en.DM00084060.pdf, ComponentLink1URL=http://www.st.com/content/ccc/resource/technical/document/datasheet/13/e4/a1/65/8b/79/44/73/DM00084060.pdf/files/DM00084060.pdf/jcr:content/translations/en.DM00084060.pdf, FET Feature=-, FET Type=P-Channel, Gate Charge (Qg) (Max) @ Vgs="6nC @ 4.5V", Mounting Type="Surface Mount", Packaging="Cut Tape (CT)", Part Status=Active, Rds On (Max) @ Id, Vgs="56 mOhm @ 2A, 10V", Supplier 1=Digi-Key, Supplier Device Package=SOT-23-6, Technology="MOSFET (Metal Oxide)", Vgs (Max)=±20V, Vgs(th) (Max) @ Id="2.5V @ 250µA"
Q6: "N-Channel 60V 310mA (Ta) 370mW (Ta) Surface Mount SOT-23", Case/Package=TO-236-3, Continuous Drain Current (ID)=1.6A, Drain to Source Breakdown Voltage=60V, Drain to Source Resistance=140mR, Gate to Source Voltage (Vgs)=20V, Input Capacitance=315pF, Manufacturer=Diodes, Manufacturer Part Number=DMN6140L-7, Max Operating Temperature=150°C, Max Power Dissipation=700mW, Min Operating Temperature=-55°C, Package Quantity=3000, Power Dissipation=540mW, Supplier Part Number 1=DMN65D8L-7DICT-ND, Threshold Voltage=3V, ComponentLink1Description=https://datasheet.ciiva.com/29747/dmn6140l-29747654.pdf, ComponentLink1URL=https://datasheet.ciiva.com/29747/dmn6140l-29747654.pdf, ComponentLink2Description=https://datasheet.ciiva.com/29747/dmn6140l-29747660.pdf, ComponentLink2URL=https://datasheet.ciiva.com/29747/dmn6140l-29747660.pdf, ComponentLink3Description=https://datasheet.ciiva.com/6371/dmn65d8l-6371124.pdf, ComponentLink3URL=https://datasheet.ciiva.com/6371/dmn65d8l-6371124.pdf, ComponentLink4Description=https://datasheet.ciiva.com/6371/dmn65d8l-6371126.pdf, ComponentLink4URL=https://datasheet.ciiva.com/6371/dmn65d8l-6371126.pdf, ComponentLink5Description=https://datasheet.ciiva.com/13058/dmn65d8l-219098-13058455.pdf, ComponentLink5URL=https://datasheet.ciiva.com/13058/dmn65d8l-219098-13058455.pdf, ComponentLink6Description=https://datasheet.ciiva.com/6371/dmn65d8l-6371128.pdf, ComponentLink6URL=https://datasheet.ciiva.com/6371/dmn65d8l-6371128.pdf, Drain to Source Voltage (Vdss)=60V, Element Configuration=Single, Fall Time=2.7ns, FET Type="1 N-Channel", Height=1.1mm, Lead Free="Lead Free", Length=3mm, Mount="Surface Mount", Number of Channels=1, Number of Elements=1, Number of Pins=3, Packaging="Tape and Reel", Rds On Max=140mR, REACH SVHC="No SVHC", Rise Time=3.6ns, Stock 1=0, Supplier 1=Digi-Key, Turn-Off Delay Time=16.3ns, Turn-On Delay Time=2.6ns, Weight=0.000282oz, Width=1.4mm
R1 R3 R11 R12 R14 R15 R40: "RES SMD 0.0 OHM JUMPER 1/4W 0603", Manufacturer 1="Vishay Dale", Manufacturer Part Number 1=CRCW06030000Z0EAHP, Operating Temperature="-55°C ~ 155°C", Package / Case="0603 (1608 Metric)", Power (Watts)=1/4W, Resistance=0.0, Supplier Device Package=0603, Supplier Part Number 1=541-0.0SBCT-ND, ComponentLink1Description=http://www.vishay.com/docs/20043/crcwhpe3.pdf, ComponentLink1URL=http://www.vishay.com/docs/20043/crcwhpe3.pdf, Composition="Thick Film", Failure Rate=-, Height - Seated (Max)="0.022\" (0.55mm)", Packaging="Cut Tape (CT)", Part Status=Active, Size / Dimension="0.063\" L x 0.033\" W (1.60mm x 0.85mm)", Supplier 1=Digi-Key
R2 R8 R16: "RES SMD 604 OHM 1% 1/10W 0603", Manufacturer 1=Yageo, Manufacturer Part Number 1=RC0603FR-07604RL, Operating Temperature="-55°C ~ 155°C", Package / Case="0603 (1608 Metric)", Power=1/10W, Resistance=604, Supplier Device Package=0603, Supplier Part Number 1=311-604HRCT-ND, Temperature Coefficient=±100ppm/°C, Tolerance=±1%, ComponentLink1Description=http://www.yageo.com/documents/recent/PYu-RC_Group_51_RoHS_L_7.pdf, ComponentLink1URL=http://www.yageo.com/documents/recent/PYu-RC_Group_51_RoHS_L_7.pdf, Composition="Thick Film", Failure Rate=-, Height - Seated (Max)="0.022\" (0.55mm)", Packaging="Cut Tape (CT)", Part Status=Active, Size / Dimension="0.063\" L x 0.031\" W (1.60mm x 0.80mm)", Supplier 1=Digi-Key
R4 R17 R19 R22 R23 R24 R25 R27 R28 R32 R33: "4.7k Ohm ±1% 0.1W, 1/10W Chip Resistor 0603 (1608 Metric) Moisture Resistant Thick Film", Manufacturer 1=Yageo, Manufacturer Part Number 1=RC0603FR-074K7L, Operating Temperature="-55°C ~ 155°C", Package / Case="0603 (1608 Metric)", Power (Watts)=1/10W, Resistance (Ohms)=4.7k, Supplier Device Package=0603, Supplier Part Number 1=311-4.70KHRCT-ND, Temperature Coefficient=±100ppm/°C, Tolerance=±1%, Category=Resistors, ComponentLink1Description=http://www.yageo.com/documents/recent/PYu-RC_Group_51_RoHS_L_7.pdf, ComponentLink1URL=http://www.yageo.com/documents/recent/PYu-RC_Group_51_RoHS_L_7.pdf, Composition="Thick Film", Description 1="RES SMD 4.7K OHM 1% 1/10W 0603", Failure Rate=-, Features="Moisture Resistant", Height - Seated (Max)="0.022\" (0.55mm)", Packaging="Cut Tape (CT)", Part Status=Active, Pricing 1="1=0.16, 10=0.022, 100=0.0089, 1000=0.00402, 2500=0.00349 (CAD)", RoHS="RoHS Compliant", Size / Dimension="0.063\" L x 0.031\" W (1.60mm x 0.80mm)", Stock 1=3487566, Supplier 1=Digi-Key
R5 R9 R29: library part "RES 2K OHM 1% 1/10W 0603", "2k Ohm ±1% 0.1W, 1/10W Chip Resistor 0603 (1608 Metric) Moisture Resistant Thick Film", Manufacturer=Yageo, Manufacturer Part Number=RC0603FR-072KL, Operating Temperature="-55°C ~ 155°C", Package / Case="0603 (1608 Metric)", Power (Watts)="0.1W, 1/10W", Resistance (Ohms)=2k, Supplier Device Package=0603, Supplier Part Number 1=311-2.00KHRCT-ND, Temperature Coefficient=±100ppm/°C, Tolerance=±1%, Category=Resistors, ComponentLink1Description=http://www.yageo.com/documents/recent/PYu-RC_Group_51_RoHS_L_7.pdf, ComponentLink1URL=http://www.yageo.com/documents/recent/PYu-RC_Group_51_RoHS_L_7.pdf, Composition="Thick Film", Failure Rate=-, Features="Moisture Resistant", Height - Seated (Max)="0.022\" (0.55mm)", Packaging="Cut Tape (CT)", Part Status=Active, Pricing 1="1=0.15, 10=0.023, 100=0.0093, 1000=0.00415, 2500=0.0036 (CAD)", RoHS="RoHS Compliant", Size / Dimension="0.063\" L x 0.031\" W (1.60mm x 0.80mm)", Stock 1=1750701, Supplier 1=Digi-Key
R6 R10 R46 R47: library part "RES 62 OHM 0.1% 1/10W 0603", "62 Ohms ±0.1% 0.1W, 1/10W Chip Resistor 0603 (1608 Metric) Automotive AEC-Q200 Thin Film", Manufacturer="Panasonic Electronic Components", Manufacturer Part Number=ERA-3AEB620V, Operating Temperature="-55°C ~ 155°C", Package / Case="0603 (1608 Metric)", Power (Watts)="0.1W, 1/10W", Supplier Device Package=0603, Supplier Part Number 1=P62DBCT-ND, Temperature Coefficient=±25ppm/°C, Tolerance=±0.1%, Category=Resistors, ComponentLink1Description=https://industrial.panasonic.com/cdbs/www-data/pdf/RDM0000/AOA0000C307.pdf, ComponentLink1URL=https://industrial.panasonic.com/cdbs/www-data/pdf/RDM0000/AOA0000C307.pdf, Composition="Thin Film", Failure Rate=-, Features="Automotive AEC-Q200", Height - Seated (Max)="0.022\" (0.55mm)", Packaging="Cut Tape (CT)", Part Status=Active, Pricing 1="1=0.52, 10=0.447, 100=0.1748, 1000=0.07317, 2500=0.06708 (CAD)", RoHS="RoHS Compliant", Size / Dimension="0.063\" L x 0.032\" W (1.60mm x 0.80mm)", Stock 1=10320, Supplier 1=Digi-Key
R7 R13: "RES SMD 1.4K OHM 1% 1/10W 0603", Manufacturer 1=Yageo, Manufacturer Part Number 1=RC0603FR-071K4L, Operating Temperature="-55°C ~ 155°C", Package / Case="0603 (1608 Metric)", Power=1/10W, Resistance=1.4k, Supplier Device Package=0603, Supplier Part Number 1=311-1.40KHRCT-ND, Temperature Coefficient=±100ppm/°C, Tolerance=±1%, ComponentLink1Description=http://www.yageo.com/documents/recent/PYu-RC_Group_51_RoHS_L_7.pdf, ComponentLink1URL=http://www.yageo.com/documents/recent/PYu-RC_Group_51_RoHS_L_7.pdf, Composition="Thick Film", Failure Rate=-, Height - Seated (Max)="0.022\" (0.55mm)", Packaging="Cut Tape (CT)", Part Status=Active, Size / Dimension="0.063\" L x 0.031\" W (1.60mm x 0.80mm)", Supplier 1=Digi-Key
R18: library part "RES 4.7K OHM 1% 1/10W 0603", "4.7k Ohm ±1% 0.1W, 1/10W Chip Resistor 0603 (1608 Metric) Moisture Resistant Thick Film", Manufacturer 1=Yageo, Manufacturer Part Number 1=RC0603FR-074K7L, Operating Temperature="-55°C ~ 155°C", Package / Case="0603 (1608 Metric)", Power (Watts)=1/10W, Resistance (Ohms)=4.7k, Supplier Device Package=0603, Supplier Part Number 1=311-4.70KHRCT-ND, Temperature Coefficient=±100ppm/°C, Tolerance=±1%, Category=Resistors, ComponentLink1Description=http://www.yageo.com/documents/recent/PYu-RC_Group_51_RoHS_L_7.pdf, ComponentLink1URL=http://www.yageo.com/documents/recent/PYu-RC_Group_51_RoHS_L_7.pdf, Composition="Thick Film", Description 1="RES SMD 4.7K OHM 1% 1/10W 0603", Failure Rate=-, Features="Moisture Resistant", Height - Seated (Max)="0.022\" (0.55mm)", Packaging="Cut Tape (CT)", Part Status=Active, Pricing 1="1=0.16, 10=0.022, 100=0.0089, 1000=0.00402, 2500=0.00349 (CAD)", RoHS="RoHS Compliant", Size / Dimension="0.063\" L x 0.031\" W (1.60mm x 0.80mm)", Stock 1=3487566, Supplier 1=Digi-Key
R20 R30 R34 R35: "22.1 Ohm ±1% 0.1W, 1/10W Chip Resistor 0603 (1608 Metric) Moisture Resistant Thick Film", Manufacturer 1=Yageo, Manufacturer Part Number 1=RC0603FR-0722R1L, Operating Temperature="-55°C ~ 155°C", Package / Case="0603 (1608 Metric)", Power=1/10W, Resistance=22.1, Supplier Device Package=0603, Supplier Part Number 1=311-22.1HRCT-ND, Temperature Coefficient=±100ppm/°C, Tolerance=±1%, ComponentLink1Description=http://www.yageo.com/documents/recent/PYu-RC_Group_51_RoHS_L_7.pdf, ComponentLink1URL=http://www.yageo.com/documents/recent/PYu-RC_Group_51_RoHS_L_7.pdf, Composition="Thick Film", Failure Rate=-, Height - Seated (Max)="0.022\" (0.55mm)", Packaging="Cut Tape (CT)", Part Status=Active, Size / Dimension="0.063\" L x 0.031\" W (1.60mm x 0.80mm)", Supplier 1=Digi-Key
R21 R31 R36 R37 R41 R43 R45: "RES SMD 10K OHM 1% 1/10W 0603", Manufacturer 1=Yageo, Manufacturer Part Number 1=RC0603FR-0710KL, Operating Temperature="-55°C ~ 155°C", Package / Case="0603 (1608 Metric)", Power=1/10W, Resistance=10k, Supplier Device Package=0603, Supplier Part Number 1=311-10.0KHRCT-ND, Temperature Coefficient=±100ppm/°C, Tolerance=±1%, ComponentLink1Description=http://www.yageo.com/documents/recent/PYu-RC_Group_51_RoHS_L_7.pdf, ComponentLink1URL=http://www.yageo.com/documents/recent/PYu-RC_Group_51_RoHS_L_7.pdf, Composition="Thick Film", Failure Rate=-, Height - Seated (Max)="0.022\" (0.55mm)", Packaging="Cut Tape (CT)", Part Status=Active, Size / Dimension="0.063\" L x 0.031\" W (1.60mm x 0.80mm)", Supplier 1=Digi-Key
R26: "3.3k Ohm ±1% 0.25W, 1/4W Chip Resistor 0603 (1608 Metric) Automotive AEC-Q200, Pulse Withstanding Thick Film", Manufacturer 1="Panasonic Electronic Components", Manufacturer Part Number 1=ERJ-PA3F3301V, Operating Temperature="-55°C ~ 155°C", Package / Case="0603 (1608 Metric)", Power=1/4W, Resistance=3.3k, Supplier Device Package=0603, Supplier Part Number 1=P3.3KBYCT-ND, Temperature Coefficient=±100ppm/°C, Tolerance=±1%, ComponentLink1Description=https://industrial.panasonic.com/cdbs/www-data/pdf/RDO0000/AOA0000C291.pdf, ComponentLink1URL=https://industrial.panasonic.com/cdbs/www-data/pdf/RDO0000/AOA0000C291.pdf, Composition="Thick Film", Failure Rate=-, Height - Seated (Max)="0.022\" (0.55mm)", Packaging="Cut Tape (CT)", Part Status=Active, Size / Dimension="0.063\" L x 0.031\" W (1.60mm x 0.80mm)", Supplier 1=Digi-Key
R38: "330 Ohms ±1% 0.1W, 1/10W Chip Resistor 0603 (1608 Metric) Automotive AEC-Q200, Moisture Resistant Thick Film", Manufacturer="TE Connectivity", Manufacturer Part Number=1-2176339-9, Power=1/10W, Resistance=330, Supplier Part Number 1=A129682TR-ND, Stock 1=0, Supplier 1=Digi-Key